# Altium PCB EP3C25.PcbDoc (part 1 of 4)
Units mil, origin at the board's own origin, x right, y up, seen from the top; angles counter-clockwise.
Board outline 6000 x 4000 mil, 2 copper layers (Top Layer, Bottom Layer); 113 components, 182 nets, 855 pads, 215 vias.
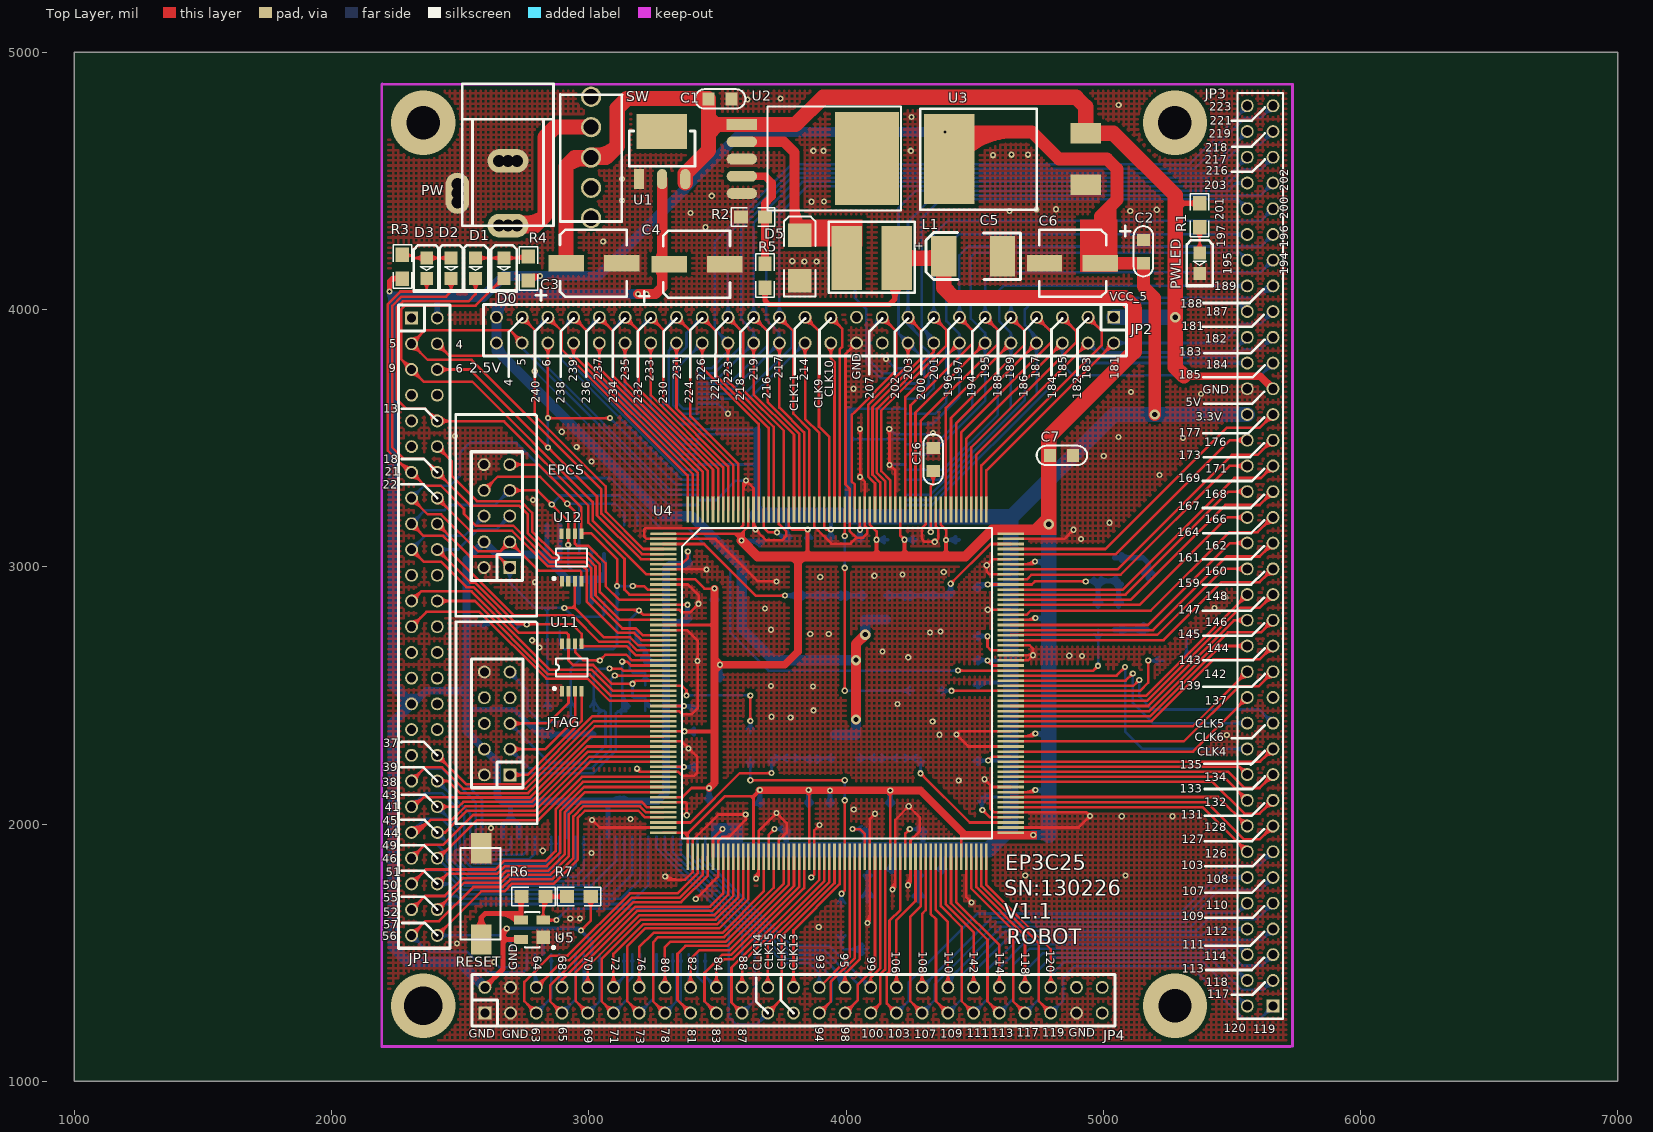
[diagram p0: Top Layer view]
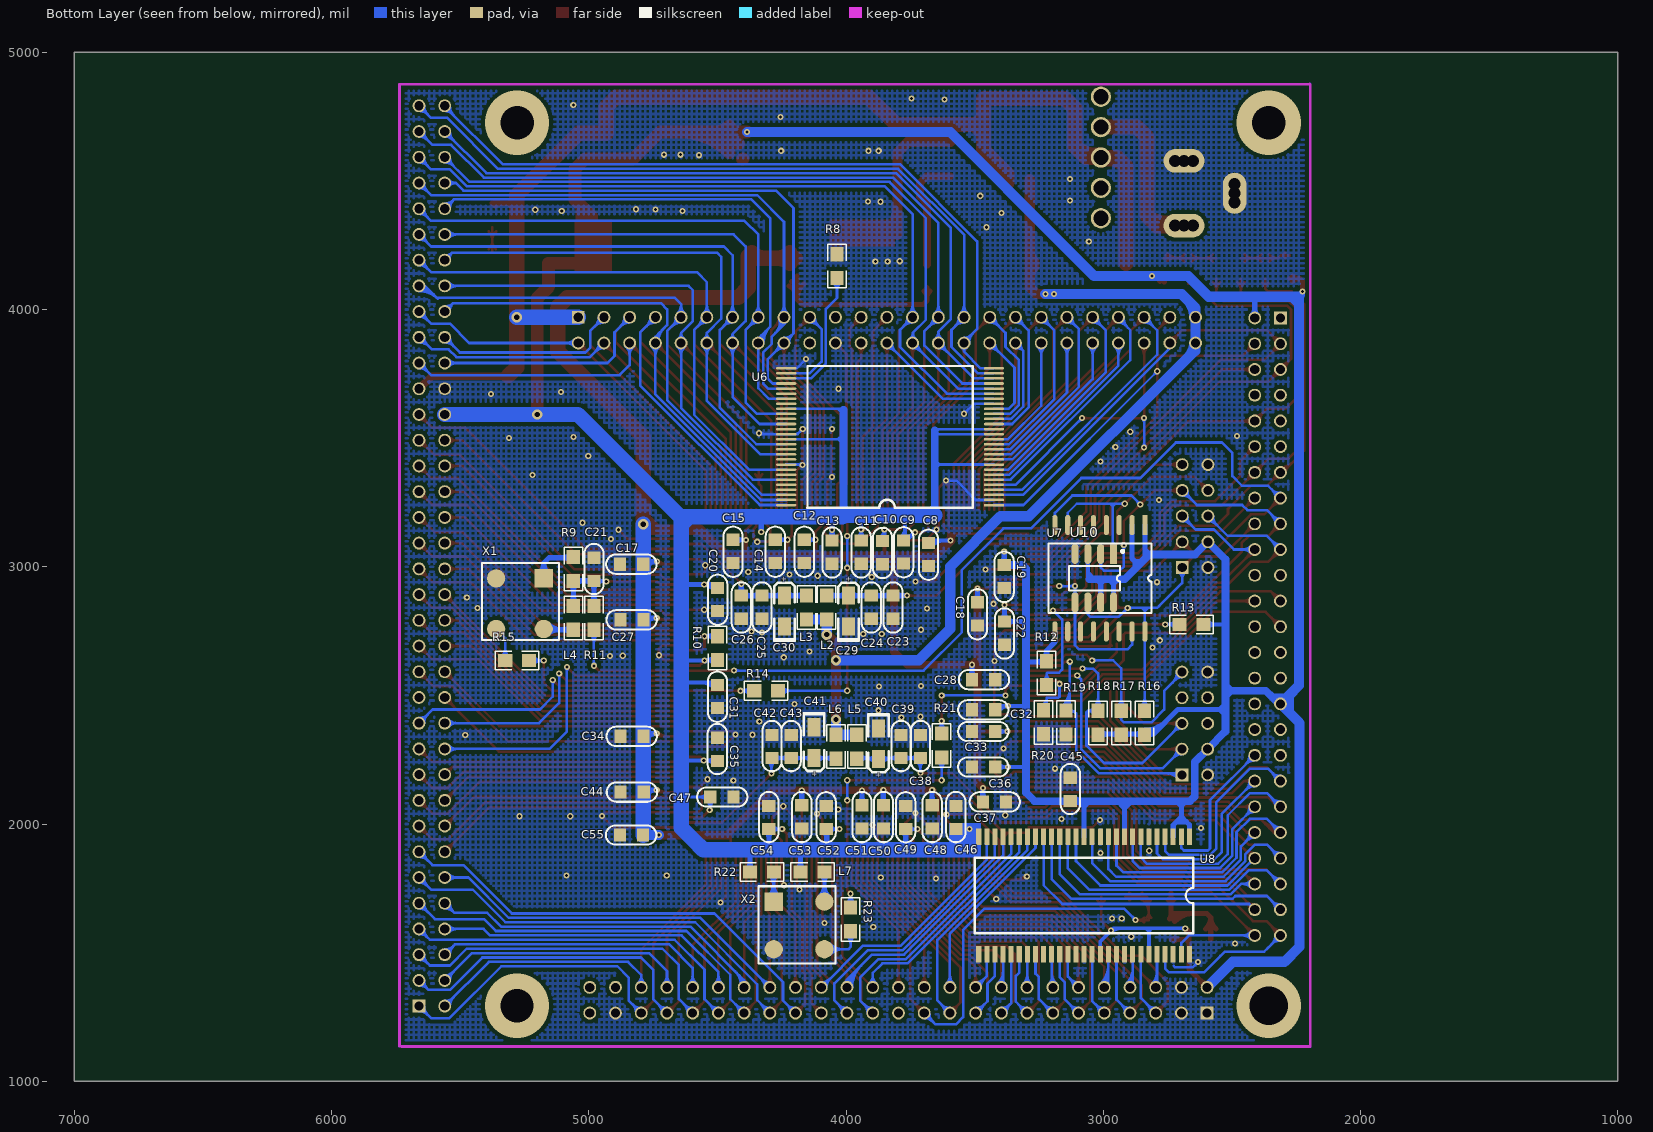
[diagram p1: Bottom Layer view, seen from below]

## Layer stack, top to bottom
Top Layer: signal copper 1.4
Dielectric: dielectric 12.6, FR-4, Dk 4.8
Bottom Layer: signal copper 1.4

## Board outline
1000,1000 7000,1000 7000,5000 1000,5000

## Design rules (kind name [scope] priority, off if disabled: settings)
Clearance Clearance_1 [InPolygon] p1: gap=15
Clearance [All] p2 off: gap=7
ComponentClearance [OnLayer('Keep-Out Layer') vs OnLayer('Keep-Out Layer')] p1: gap=0 collisioncheckmode=3 verticalgap=0 showdistances=FALSE
HoleSize [All] p1: absolutevalues=TRUE maxlimit=200 minlimit=1 maxpercent=80.000 minpercent=20.000
HoleToHoleClearance [All] p1: gap=0 allowstackedmicrovias=TRUE
MinimumSolderMaskSliver [All] p1: minsoldermaskwidth=0
PolygonConnect [All] p1: connectstyle=Direct reliefconductorwidth=20 reliefentries=4 polygonreliefangle="45 Angle"
RoutingVias [All] p1: holewidth=28 width=50 viastyle="Through Hole" minholewidth=12 minwidth=20 maxholewidth=200 maxwidth=300
SilkToSilkClearance [All] p1: silktosilkclearance=0
SilkscreenOverComponentPads [All] p1: minsilkscreentomaskgap=0
SolderMaskExpansion [All] p1: expansion=0
TestPointUsage [All] p1: valid=0 allowmultiple=FALSE
Testpoint [All] p1: side=15 testpointundercomponent=TRUE minsize=40 maxsize=100 preferedsize=60 minholesize=0 maxholesize=40 preferedholesize=32 testpointgrid=1 style=1023 order=0123456789
Width [All] p1: maxlimit=600 minlimit=8 preferedwidth=12
18 further rules are at their usual default settings.

## Components (designator, comment, footprint, x,y, rotation, side; value= is the part's Value field where it differs from the comment)
C1 "0.1uF" 0805C 3555,4819 r180 top
C2 "0.1uF" 0805C 5156,4270 r270 top
C3 "220uF" Cap6.6*6.6 3020,4180 r180 top locked
C4 "100uF" Cap6.6*6.6 3421,4176 r180 top
C5 "220uF" 8228 4380,4207 r0 top
C6 "100uF" Cap6.6*6.6 4880,4180 r0 top
C7 "0.1uF" 0805C 4883,3433 r180 top
C8 "0.1uF" 0805C 3679,3003 r90 bottom
C9 "0.1uF" 0805C 3776,3012.6 r90 bottom
C10 "0.1uF" 0805C 3858,3010 r90 bottom
C11 "0.1uF" 0805C 3941,3012 r90 bottom
C12 "0.1uF" 0805C 4162,3015 r90 bottom
C13 "0.1uF" 0805C 4054,3012 r90 bottom
C14 "0.1uF" 0805C 4275,3015 r90 bottom
C15 "0.1uF" 0805C 4439,3015 r90 bottom
C16 "0.1uF" 0805C 4339,3462 r270 top
C17 "0.1uF" 0805C 4878,3010 r180 bottom
C18 "0.1uF" 0805C 3489,2772 r90 bottom
C19 "0.1uF" 0805C 3385,2917 r90 bottom
C20 "0.1uF" 0805C 4499,2828 r90 bottom
C21 "0.1uF" 0805C 4980,3035 r270 bottom
C22 "0.1uF" 0805C 3384,2697 r90 bottom
C23 "0.001uF" 0805C 3817,2798 r90 bottom
C24 "0.1uF" 0805C 3902,2798 r90 bottom
C25 "0.001uF" 0805C 4327,2798 r90 bottom
C26 "0.1uF" 0805C 4407,2798 r90 bottom
C27 "0.1uF" 0805C 4877,2794 r180 bottom
C28 "0.1uF" 0805C 3420,2561 r0 bottom
C29 "10uF" 3216C/A 3990,2888 r270 bottom
C30 "10uF" 3216C/A 4239,2888 r270 bottom
C31 "0.1uF" 0805C 4500,2451 r90 bottom
C32 "0.1uF" 0805C 3510,2444 r180 bottom
C33 "0.1uF" 0805C 3510,2360 r180 bottom
C34 "0.1uF" 0805C 4877,2341 r180 bottom
C35 "0.1uF" 0805C 4500,2335 r270 bottom
C36 "0.1uF" 0805C 3510,2222 r180 bottom
C37 "0.1uF" 0805C 3378,2086 r0 bottom
C38 "0.001uF" 0805C 3710,2346.57 r270 bottom
C39 "0.1uF" 0805C 3786,2346.57 r270 bottom
C40 "10uF" 3216C/A 3873,2252 r90 bottom
C41 "10uF" 3216C/A 4124,2256 r90 bottom
C42 "0.001uF" 0805C 4288,2346.57 r270 bottom
C43 "0.1uF" 0805C 4213,2346.57 r270 bottom
C44 "0.1uF" 0805C 4876,2124 r180 bottom
C45 "0.1uF" 0805C 3128,2180 r270 bottom
C46 "0.1uF" 0805C 3573,2070.57 r270 bottom
C47 "0.1uF" 0805C 4437.6,2105 r0 bottom
C48 "0.1uF" 0805C 3665,1983.17 r90 bottom
C49 "0.1uF" 0805C 3768,2070 r270 bottom
C50 "0.1uF" 0805C 3854,1983.17 r90 bottom
C51 "0.1uF" 0805C 3938,1983.17 r90 bottom
C52 "0.1uF" 0805C 4077,2070 r270 bottom
C53 "0.1uF" 0805C 4172,1983.17 r90 bottom
C54 "0.1uF" 0805C 4300,2070.57 r270 bottom
C55 "0.1uF" 0805C 4879,1957 r180 bottom
D0 "LED0" 0805A 2670,4200 r270 top
D1 "LED1" 0805A 2560,4200 r270 top
D2 "LED2" 0805A 2465,4200 r270 top
D3 "LED3" 0805A 2370,4200 r270 top
D5 "S340" SMB 3820,4200 r90 top
EPCS "EPCS" IDC10_S 2693,2997 r0 top locked
JP1 "Bank1" IDC50-S 2349,3431 r180 top locked
JP2 "Bank2" IDC50-S 4505,3932 r90 top locked
JP3 "HEADER 36X2" IDC72_S 5594,3038 r0 top locked
JP4 "Bank4" IDC50-S 3132,1303 r270 top locked
JTAG "JTAG" IDC10_S 2694,2191 r0 top
L1 "1.5A" 临时画的电感封装 4100,4200 r0 top
L2 "600 Ohm@100Mhz" 0805R 4075,2795 r90 bottom
L3 "600 Ohm@100Mhz" 0805R 4154,2795 r90 bottom
L4 "600 Ohm@100Mhz" 0805R 5060,2755 r90 bottom
L5 "600 Ohm@100Mhz" 0805R 3958,2347 r270 bottom
L6 "600 Ohm@100Mhz" 0805R 4039,2347 r270 bottom
L7 "600 Ohm@100Mhz" 0805R 4084,1813 r0 bottom
PW "CON3" PW_PORT 2690,4472 r0 top
PWLED "LED" 0805A 5375,4220 r270 top
R1 "1K" 0805R 5375,4320 r90 top
R2 "NC" 0805R 3592,4360 r0 top
R3 "1K" 0805R 2275,4120 r90 top
R4 "1K" 0805R 2765,4113 r90 top
R5 "0" 0805R 3685,4085 r90 top
R6 "NC" 0805R 2832,1718 r180 top
R7 "4.7K" 0805R 3008,1718 r180 top
R8 "5.1K" 0805R 4035,4215 r270 bottom
R9 "10K" 0805R 5060,2945 r90 bottom
R10 "10K" 0805R 4500,2637 r90 bottom
R11 "10K" 0805R 4980,2755 r90 bottom
R12 "10K" 0805R 3220,2540 r90 bottom
R13 "10K" 0805R 2703.17,2776 r180 bottom
R14 "0" 0805R 4264,2518 r0 bottom
R15 "33" 0805R 5325,2635 r180 bottom
R16 "10K" 0805R 2840,2440 r270 bottom
R17 "10K" 0805R 2930,2440 r270 bottom
R18 "10K" 0805R 3020,2440 r270 bottom
R19 "10K" 0805R 3145,2348 r90 bottom
R20 "10K" 0805R 3232,2349 r90 bottom
R21 "0" 0805R 3628,2352 r270 bottom
R22 "10K" 0805R 4373,1813 r180 bottom
R23 "33" 0805R 3982,1583 r90 bottom
RESET "SW-PB" SMD_SWITH 2577,1746 r270 top
SW "SW SPDT" PW_SW 3009,4591 r180 top
U1 "1117-2.5" SOT-223 3195,4507 r0 top
U2 "LM2596" LM2596_TO263 3888,4596 r180 top
U3 "AMS1084_33" AMS1084-ADJ 4574,4574 r0 top
U4 "EP3C25" PQFP240 3290,3128 r0 top locked
U5 "MAX811T" SOT143 2780,1589 r90 top
U6 "JS28F640" SOP56_E28F640 3435,3240 r0 bottom locked
U7 "EPCS16" SOP16_EPCS16 2838,3162 r270 bottom locked
U8 "HY57V641620" TSOP54 2665,1950 r270 bottom locked
U10 "EPCS4" so8 2959.84,3050 r270 bottom locked
U11 "PACDN046M" MSOP8 2934,2608.18 r180 top
U12 "PACDN046M" MSOP8 2933,3035.82 r180 top
X1 "CLOCK_SOURCE" CRYSTAL4 5175,2955 r270 bottom
X2 "CLOCK_SOURCE" CRYSTAL4 4281,1698 r180 bottom

## Footprints (in the part's own frame and the unit in brackets; to place one, negate y for a bottom-side part, rotate by r counter-clockwise, add the part's x,y. Pads: shape width x height; smd on the part's side, far side on the other; paste and mask are expansions set on the pad)
0805A [mil]
  rect 50x50 smd: 1(0,0) 2(80,0)
  silkscreen extent -50,-50 130,50
0805C [mm]
  rect 1.2x1.3 smd: 1(0,0) 2(2.286,0)
  silkscreen extent -1.37,-0.95 3.59,0.95
0805R [mm]
  rect 1.4x1.3 smd: 1(0,0) 2(2.362,0)
  silkscreen extent -0.97,-0.91 3.33,0.91
3216C/A [mm] "钽电容封装A"
  rect 1.78x1.27 smd: 1(0,0) 2(3.05,0)
  silkscreen extent -1.27,-1.02 4.44,1.02
8228 [mm]
  rect 2.5x4 smd: 1(0,0) 2(5.8,0)
  silkscreen extent -1.75,-2.31 7.57,2.36
AMS1084-ADJ [mil]
  rect 118.11x78.74 smd: 1(358,-89) 3(358,111)
  rect 196.85x350.85 smd: 2(-172,11)
  silkscreen extent -285,-186 168,207
Cap6.6*6.6 [mm]
  rect 3.5x1.6 smd: 1(2.75,0) 2(-2.75,0)
  silkscreen extent -3.25,-3.3 5.73,3.68
CRYSTAL4 [mm]
  rect 1.8x1.8 smd: 1(0,0)
  round 1.8 smd: 2(0,-4.7) 3(5,-4.7) 4(5,0)
  silkscreen extent -1.52,-6.1 6.1,1.52
IDC10_S [mm]
  rect 1.27x1.27 hole 0.9: 1(0,0)
  round 1.27 hole 0.9: 2(-2.54,0) 3(0,2.54) 4(-2.54,2.54) 5(0,5.08) 6(-2.54,5.08) 7(0,7.62) 8(-2.54,7.62) 9(0,10.16) 10(-2.54,10.16)
  silkscreen extent -5.33,-4.83 2.67,15.11
IDC50-S [mil]
  rect 50x50 hole 35.43: 1(38,-536)
  round 50 hole 35.43: 2(-62,-536) 3(38,-436) 4(-62,-436) 5(38,-336) 6(-62,-336) 7(38,-236) 8(-62,-236) 9(38,-136) 10(-62,-136) 11(38,-36) 12(-62,-36) 13(38,64) 14(-62,64) 15(38,164) 16(-62,164) 17(38,264) 18(-62,264) 19(38,364) 20(-62,364) 21(38,464) 22(-62,464) 23(38,564) 24(-62,564) 25(38,664) 26(-62,664) 27(38,764) 28(-62,764) 29(38,864) 30(-62,864) 31(38,964) 32(-62,964) 33(38,1064) 34(-62,1064) 35(38,1164) 36(-62,1164) 37(38,1264) 38(-62,1264) 39(38,1364) 40(-62,1364) 41(38,1464) 42(-62,1464) 43(38,1564) 44(-62,1564) 45(38,1664) 46(-62,1664) 47(38,1764) 48(-62,1764) 49(38,1864) 50(-62,1864)
  silkscreen extent -112,-586 88,1914
IDC72_S [mil]
  rect 50x50 hole 35.43: 1(66,-1746)
  round 50 hole 35.43: 2(-34,-1746) 3(66,-1646) 4(-34,-1646) 5(66,-1546) 6(-34,-1546) 7(66,-1446) 8(-34,-1446) 9(66,-1346) 10(-34,-1346) 11(66,-1246) 12(-34,-1246) 13(66,-1146) 14(-34,-1146) 15(66,-1046) 16(-34,-1046) 17(66,-946) 18(-34,-946) 19(66,-846) 20(-34,-846) 21(66,-746) 22(-34,-746) 23(66,-646) 24(-34,-646) 25(66,-546) 26(-34,-546) 27(66,-446) 28(-34,-446) 29(66,-346) 30(-34,-346) 31(66,-246) 32(-34,-246) 33(66,-146) 34(-34,-146) 35(66,-46) 36(-34,-46) 37(66,54) 38(-34,54) 39(66,154) 40(-34,154) 41(66,254) 42(-34,254) 43(66,354) 44(-34,354) 45(66,454) 46(-34,454) 47(66,554) 48(-34,554) 49(66,654) 50(-34,654) 51(66,754) 52(-34,754) 53(66,854) 54(-34,854) 55(66,954) 56(-34,954) 57(66,1054) 58(-34,1054) 59(66,1154) 60(-34,1154) 61(66,1254) 62(-34,1254) 63(66,1354) 64(-34,1354) 65(66,1454) 66(-34,1454) 67(66,1554) 68(-34,1554) 69(66,1654) 70(-34,1654) 71(66,1754) 72(-34,1754)
  silkscreen extent -72,-1795 104,1803
LM2596_TO263 [mm]
  rect 6.35x9.16 smd: 0(-4.928,0.229)
  rect 3x1.07 smd: 1(7.442,-3.124)
  oval 3x1.07 smd: 2(7.442,-1.424) 3(7.442,0.276) 4(7.442,1.976) 5(7.442,3.676)
  silkscreen extent -8.25,-4.9 4.93,5.36
MSOP8 [mm] "EP3核心板专用 引脚短版"
  rect 0.4x1.042 smd paste+0 mask+0: 1(0.96,2.329)
  rect 0.4x1.042 smd: 2(0.325,2.329) 3(-0.325,2.329) 4(-0.975,2.329) 5(-0.975,-2.329) 6(-0.325,-2.329) 7(0.325,-2.329) 8(0.975,-2.329)
  silkscreen extent -1.55,-0.9 1.85,2.2
PQFP240 [mm]
  oval 2.6x0.254 smd: 1(0,0)
  rect 2.6x0.254 smd: 2(0,-0.5) 3(0,-1) 4(0,-1.5) 5(0,-2) 6(0,-2.5) 7(0,-3) 8(0,-3.5) 9(0,-4) 10(0,-4.5) 11(0,-5) 12(0,-5.5) 13(0,-6) 14(0,-6.5) 15(0,-7) 16(0,-7.5) 17(0,-8) 18(0,-8.5) 19(0,-9) 20(0,-9.5) 21(0,-10) 22(0,-10.5) 23(0,-11) 24(0,-11.5) 25(0,-12) 26(0,-12.5) 27(0,-13) 28(0,-13.5) 29(0,-14) 30(0,-14.5) 31(0,-15) 32(0,-15.5) 33(0,-16) 34(0,-16.5) 35(0,-17) 36(0,-17.5) 37(0,-18) 38(0,-18.5) 39(0,-19) 40(0,-19.5) 41(0,-20) 42(0,-20.5) 43(0,-21) 44(0,-21.5) 45(0,-22) 46(0,-22.5) 47(0,-23) 48(0,-23.5) 49(0,-24) 50(0,-24.5) 51(0,-25) 52(0,-25.5) 53(0,-26) 54(0,-26.5) 55(0,-27) 56(0,-27.5) 57(0,-28) 58(0,-28.5) 59(0,-29) 60(0,-29.5) 121(34.3,-29.5) 122(34.3,-29) 123(34.3,-28.5) 124(34.3,-28) 125(34.3,-27.5) 126(34.3,-27) 127(34.3,-26.5) 128(34.3,-26) 129(34.3,-25.5) 130(34.3,-25) 131(34.3,-24.5) 132(34.3,-24) 133(34.3,-23.5) 134(34.3,-23) 135(34.3,-22.5) 136(34.3,-22) 137(34.3,-21.5) 138(34.3,-21) 139(34.3,-20.5) 140(34.3,-20) 141(34.3,-19.5) 142(34.3,-19) 143(34.3,-18.5) 144(34.3,-18) 145(34.3,-17.5) 146(34.3,-17) 147(34.3,-16.5) 148(34.3,-16) 149(34.3,-15.5) 150(34.3,-15) 151(34.3,-14.5) 152(34.3,-14) 153(34.3,-13.5) 154(34.3,-13) 155(34.3,-12.5) 156(34.3,-12) 157(34.3,-11.5) 158(34.3,-11) 159(34.3,-10.5) 160(34.3,-10) 161(34.3,-9.5) 162(34.3,-9) 163(34.3,-8.5) 164(34.3,-8) 165(34.3,-7.5) 166(34.3,-7) 167(34.3,-6.5) 168(34.3,-6) 169(34.3,-5.5) 170(34.3,-5) 171(34.3,-4.5) 172(34.3,-4) 173(34.3,-3.5) 174(34.3,-3) 175(34.3,-2.5) 176(34.3,-2) 177(34.3,-1.5) 178(34.3,-1) 179(34.3,-0.5) 180(34.3,0)
  rect 0.254x2.6 smd: 61(2.4,-31.9) 62(2.9,-31.9) 63(3.4,-31.9) 64(3.9,-31.9) 65(4.4,-31.9) 66(4.9,-31.9) 67(5.4,-31.9) 68(5.9,-31.9) 69(6.4,-31.9) 70(6.9,-31.9) 71(7.4,-31.9) 72(7.9,-31.9) 73(8.4,-31.9) 74(8.9,-31.9) 75(9.4,-31.9) 76(9.9,-31.9) 77(10.4,-31.9) 78(10.9,-31.9) 79(11.4,-31.9) 80(11.9,-31.9) 81(12.4,-31.9) 82(12.9,-31.9) 83(13.4,-31.9) 84(13.9,-31.9) 85(14.4,-31.9) 86(14.9,-31.9) 87(15.4,-31.9) 88(15.9,-31.9) 89(16.4,-31.9) 90(16.9,-31.9) 91(17.4,-31.9) 92(17.9,-31.9) 93(18.4,-31.9) 94(18.9,-31.9) 95(19.4,-31.9) 96(19.9,-31.9) 97(20.4,-31.9) 98(20.9,-31.9) 99(21.4,-31.9) 100(21.9,-31.9) 101(22.4,-31.9) 102(22.9,-31.9) 103(23.4,-31.9) 104(23.9,-31.9) 105(24.4,-31.9) 106(24.9,-31.9) 107(25.4,-31.9) 108(25.9,-31.9) 109(26.4,-31.9) 110(26.9,-31.9) 111(27.4,-31.9) 112(27.9,-31.9) 113(28.4,-31.9) 114(28.9,-31.9) 115(29.4,-31.9) 116(29.9,-31.9) 117(30.4,-31.9) 118(30.9,-31.9) 119(31.4,-31.9) 120(31.9,-31.9) 181(31.9,2.4) 182(31.4,2.4) 183(30.9,2.4) 184(30.4,2.4) 185(29.9,2.4) 186(29.4,2.4) 187(28.9,2.4) 188(28.4,2.4) 189(27.9,2.4) 190(27.4,2.4) 191(26.9,2.4) 192(26.4,2.4) 193(25.9,2.4) 194(25.4,2.4) 195(24.9,2.4) 196(24.4,2.4) 197(23.9,2.4) 198(23.4,2.4) 199(22.9,2.4) 200(22.4,2.4) 201(21.9,2.4) 202(21.4,2.4) 203(20.9,2.4) 204(20.4,2.4) 205(19.9,2.4) 206(19.4,2.4) 207(18.9,2.4) 208(18.4,2.4) 209(17.9,2.4) 210(17.4,2.4) 211(16.9,2.4) 212(16.4,2.4) 213(15.9,2.4) 214(15.4,2.4) 215(14.9,2.4) 216(14.4,2.4) 217(13.9,2.4) 218(13.4,2.4) 219(12.9,2.4) 220(12.4,2.4) 221(11.9,2.4) 222(11.4,2.4) 223(10.9,2.4) 224(10.4,2.4) 225(9.9,2.4) 226(9.4,2.4) 227(8.9,2.4) 228(8.4,2.4) 229(7.9,2.4) 230(7.4,2.4) 231(6.9,2.4) 232(6.4,2.4) 233(5.9,2.4) 234(5.4,2.4) 235(4.9,2.4) 236(4.4,2.4) 237(3.9,2.4) 238(3.4,2.4) 239(2.9,2.4) 240(2.4,2.4)
  silkscreen extent 1.83,-30.06 32.46,0.56
PW_PORT [mil]
  round 47 hole 47: 1(-39,-146) 1(31,-146) 2(-201,-55) 2(-201,15) 3(-39,106) 3(31,106)
  oval 160x92 hole 47: 1(-4,-146) 3(-4,106)
  oval 92x160 hole 47: 2(-201,-20)
  silkscreen extent -181,-146 173,405
PW_SW [mm]
  round 2 hole 1.5: 1(0,-3) 2(0,0) 3(0,3) ""(0,6) ""(0,-6)
  silkscreen extent -3.06,-6.23 3.04,6.33
SMB [mm] "DO-214-AA/SMB; 2 C-Bend Leads; Body 5.3 x 3.6 mm, inc. leads (LxW)"
  rect 2.3x2.3 smd: 1(-2.25,0) 2(2.25,0)
  silkscreen extent -3.8,-1.55 4.1,1.55
SMD_SWITH [mil]
  rect 118.11x78.74 smd: 1(-160,5) 2(195,5)
  silkscreen extent -160,-75 195,80
so8 [mm] "EP3特色的SO8，瘦版。"
  rect 1.973x0.7 smd: 1(0,0)
  oval 1.973x0.7 smd: 2(0,-1.27) 3(0,-2.54) 4(0,-3.81) 5(4.792,-3.81) 6(4.792,-2.54) 7(4.792,-1.27) 8(4.792,0)
  silkscreen extent -0.38,-4.41 3.6,1.02
SOP16_EPCS16 [mm]
  rect 2x0.5 smd: 1(0,0)
  oval 2x0.5 smd: 2(0,-1.27) 3(0,-2.54) 4(0,-3.81) 5(0,-5.08) 6(0,-6.35) 7(0,-7.62) 8(0,-8.89) 9(10.5,-8.89) 10(10.5,-7.62) 11(10.5,-6.35) 12(10.5,-5.08) 13(10.5,-3.81) 14(10.5,-2.54) 15(10.5,-1.27) 16(10.5,0)
  silkscreen extent 1.83,-9.53 8.67,0.63
SOP56_E28F640 [mm]
  rect 2x0.25 smd: 1(-0.254,0)
  oval 2x0.25 smd: 2(-0.254,-0.5) 3(-0.254,-1) 4(-0.254,-1.5) 5(-0.254,-2) 6(-0.254,-2.5) 7(-0.254,-3) 8(-0.254,-3.5) 9(-0.254,-4) 10(-0.254,-4.5) 11(-0.254,-5) 12(-0.254,-5.5) 13(-0.254,-6) 14(-0.254,-6.5) 15(-0.254,-7) 16(-0.254,-7.5) 17(-0.254,-8) 18(-0.254,-8.5) 19(-0.254,-9) 20(-0.254,-9.5) 21(-0.254,-10) 22(-0.254,-10.5) 23(-0.254,-11) 24(-0.254,-11.5) 25(-0.254,-12) 26(-0.254,-12.5) 27(-0.254,-13) 28(-0.254,-13.5) 29(20.254,-13.5) 30(20.254,-13) 31(20.254,-12.5) 32(20.254,-12) 33(20.254,-11.5) 34(20.254,-11) 35(20.254,-10.5) 36(20.254,-10) 37(20.254,-9.5) 38(20.254,-9) 39(20.254,-8.5) 40(20.254,-8) 41(20.254,-7.5) 42(20.254,-7) 43(20.254,-6.5) 44(20.254,-6) 45(20.254,-5.5) 46(20.254,-5) 47(20.254,-4.5) 48(20.254,-4) 49(20.254,-3.5) 50(20.254,-3) 51(20.254,-2.5) 52(20.254,-2) 53(20.254,-1.5) 54(20.254,-1) 55(20.254,-0.5) 56(20.254,0)
  silkscreen extent 1.83,-13.75 18.17,0.25
SOT143 [mm]
  rect 1.35x1.35 smd: 1(-0.75,-1.1)
  rect 0.9x1.35 smd: 2(0.95,-1.1) 3(0.95,1.1) 4(-0.95,1.1)
  silkscreen extent -1.87,-2.23 1.75,0.7
SOT-223 [mm]
  rect 1x2 smd: 1(0,0)
  oval 1x2 smd: 2(2.29,0) 3(4.58,0)
  rect 5x3.5 smd: 4(2.261,4.699)
  silkscreen extent -0.97,1.25 5.54,4.78
TSOP54 [mm]
  rect 1.651x0.5 smd: 1(-0.003,0) 2(-0.003,-0.8) 3(-0.003,-1.6) 4(-0.003,-2.4) 5(-0.003,-3.2) 6(-0.003,-4) 7(-0.003,-4.8) 8(-0.003,-5.6) 9(-0.003,-6.4) 10(-0.003,-7.2) 11(-0.003,-8) 12(-0.003,-8.8) 13(-0.003,-9.6) 14(-0.003,-10.4) 15(-0.003,-11.2) 16(-0.003,-12) 17(-0.003,-12.8) 18(-0.003,-13.6) 19(-0.003,-14.4) 20(-0.003,-15.2) 21(-0.003,-16) 22(-0.003,-16.8) 23(-0.003,-17.6) 24(-0.003,-18.4) 25(-0.003,-19.2) 26(-0.003,-20) 27(-0.003,-20.8) 28(11.597,-20.8) 29(11.597,-20) 30(11.597,-19.2) 31(11.597,-18.4) 32(11.597,-17.6) 33(11.597,-16.8) 34(11.597,-16) 35(11.597,-15.2) 36(11.597,-14.4) 37(11.597,-13.6) 38(11.597,-12.8) 39(11.597,-12) 40(11.597,-11.2) 41(11.597,-10.4) 42(11.597,-9.6) 43(11.597,-8.8) 44(11.597,-8) 45(11.597,-7.2) 46(11.597,-6.4) 47(11.597,-5.6) 48(11.597,-4.8) 49(11.597,-4) 50(11.597,-3.2) 51(11.597,-2.4) 52(11.597,-1.6) 53(11.597,-0.8) 54(11.597,0)
  silkscreen extent 2.08,-21.2 9.51,0.4
临时画的电感封装 [mm] "用于EP3C25核心板复制"
  rect 3x6.3 smd: 1(-2.476,0) 2(2.476,0)
  silkscreen extent -4.25,-3.43 4.25,3.57

## Part data
C1 C2 C7 C8 C9 C10 C11 C12 C13 C14 C15 C16 C17 C18 C19 C20 C21 C22 C23 C24 C25 C26 C27 C28 C31 C32 C33 C34 C35 C36 C37 C38 C39 C42 C43 C44 C45 C46 C47 C48 C49 C50 C51 C52 C53 C54 C55: library part Cap, "Capacitor"
C3 C4 C5 C6 C29 C30 C40 C41: library part "Cap Pol3", "Polarized Capacitor (Surface Mount)"
D0: "Typical INFRARED GaAs LED"
D1 D2 D3: library part LED0, "Typical INFRARED GaAs LED"
D5: library part "D Schottky", "Schottky Diode"
L1 L2 L3 L4 L5 L6 L7: library part Inductor, "Inductor"
PWLED: library part LED1, "Typical RED GaAs LED"
R1 R2 R3 R4 R5 R6 R7 R8 R9 R10 R11 R12 R13 R14 R15 R16 R17 R18 R19 R20 R21 R22 R23: library part Res2, "Resistor"
U11 U12: library part EPCS

## Via types
v1: diameter 24, hole 12, Top Layer to Bottom Layer, 205 vias
v2: diameter 40, hole 20, Top Layer to Bottom Layer, 6 vias
v3: diameter 250, hole 130, Top Layer to Bottom Layer, 3 vias
v4: diameter 250, hole 150, Top Layer to Bottom Layer, 1 vias

## Nets (pads, with @x,y where several pads share a name; then routed paths per layer and width w, separated by ;. In a path a pad name is that pad's centre, name@x,y a point inside that pad or via, vN(x,y) a via of type N, cw(c..) or ccw(c..) an arc to the next point about the centre after c; other vN are vias at no path point)
4: JP1.4 JP2.47 U4.4 U6.1 | length 2688.3
  Top Layer w10: JP1.4@2411,3847 cw(c2411,3798.72) 2445.14,3832.86 cw(c2479.28,3867) JP1.4@2431,3867 ; JP1.4@2411,3867 2457,3821 2780,3821 2781,3820 ; JP2.47@2741,3950 cw(c2741,3901.72) 2775.14,3935.86 cw(c2809.28,3970) JP2.47@2761,3970 ; JP2.47@2741,3970 2790,3921 2790,3829 2781,3820 ; v1@2785.05,3755.05 cw(c2773.1,3743.1) 2790,3743.1 cw(c2806.9,3743.1) v1@2794.95,3755.05 ; v1@2785.05,3764.95 ccw(c2773.1,3776.9) 2790,3776.9 ccw(c2806.9,3776.9) v1@2794.95,3764.95 ; 2790,3808 2790,3811 2781,3820 ; 2790,3843 2790,3588 3065.97,3312.03 3065.97,3214.03 3211.05,3068.95 U4.4@3290,3068.95
  Bottom Layer w10: v1@2790,3753 cw(c2790,3736.1) 2801.95,3748.05 cw(c2813.9,3760) v1@2797,3760 ; v1(2790,3760) 3310,3240 U6.1@3425,3240
5: JP1.3 JP2.48 U4.5 U6.3 | length 3036.7
  Top Layer w10: JP1.3@2311,3847 cw(c2311,3798.72) 2345.14,3832.86 cw(c2379.28,3867) 2331,3867 cw(c2379.28,3867) 2345.14,3901.14 cw(c2311,3935.28) JP1.3@2311,3887 ; 2705.44,3907.56 cw(c2667.89,3870) JP2.48@2721,3870 ; 2710.27,3902.73 ccw(c2741,3933.46) JP2.48@2741,3890 ; 2722.51,3890.49 cw(c2702.03,3870) JP2.48@2731,3870 ; JP2.48@2741,3870 2741,3872 2693,3920 2364,3920 JP1.3@2311,3867 2374,3804 2544.96,3804 3048.97,3299.99 3048.97,3206.99 3206.7,3049.26 U4.5@3290,3049.26
  Bottom Layer w10: JP2.48@2741,3870 2741,3849.96 3311.59,3279.37 U6.3@3425,3279.37
6: JP1.6 JP2.46 U4.6 U6.5 | length 2689.3
  Top Layer w10: JP1.6@2411,3767 2539,3767 3031.97,3274.03 3031.97,3199.94 3202.34,3029.58 U4.6@3290,3029.58 ; JP1.6@2425.14,3752.86 cw(c2459.28,3718.72) 2459.28,3767 cw(c2459.28,3815.28) JP1.6@2425.14,3781.14 ; JP2.46@2826.86,3855.86 cw(c2792.72,3821.72) 2841,3821.72 cw(c2889.28,3821.72) JP2.46@2855.14,3855.86 ; 2828.34,3477.66 cw(c2814.69,3464) v1@2834,3464 ; 2830.76,3475.24 ccw(c2841,3485.49) v1@2841,3471 ; v1@2836.05,3582.95 ccw(c2824.1,3594.9) 2841,3594.9 ccw(c2857.9,3594.9) 2845.95,3582.95 ccw(c2857.9,3594.9) 2857.9,3578 ccw(c2857.9,3561.1) v1@2845.95,3573.05 ; v1@2841,3457 cw(c2841,3437.69) 2854.66,3451.34 ; JP2.46@2841,3870 v1(2841,3578) v1(3082,3578) ; v1@2848,3464 ccw(c2862.49,3464) 2852.24,3453.76 ; v1@3077.05,3573.05 ccw(c3065.1,3561.1) 3065.1,3578 ccw(c3065.1,3594.9) v1@3077.05,3582.95
  Bottom Layer w10: v1@2836.05,3468.95 ccw(c2824.1,3480.9) 2841,3480.9 ccw(c2857.9,3480.9) v1@2845.95,3468.95 ; v1@2836.05,3573.05 cw(c2824.1,3561.1) 2841,3561.1 cw(c2857.9,3561.1) v1@2845.95,3573.05 ; v1(2841,3464) v1(2841,3578) ; v1@3082,3571 cw(c3082,3554.1) 3093.95,3566.05 cw(c3105.9,3578) v1@3089,3578 ; v1(3082,3578) 3341.26,3318.74 U6.5@3425,3318.74
9: D0.2 JP1.5 U4.9 | length 2418.7
  Top Layer w10: JP1.5@2291,3767 ccw(c2242.72,3767) 2276.86,3801.14 ccw(c2311,3835.28) JP1.5@2311,3787 ; JP1.5@2311,3747 cw(c2311,3698.72) 2345.14,3732.86 cw(c2379.28,3767) JP1.5@2331,3767 ; 2474.91,3720 2358,3720 ; 2627.32,4082.32 cw(c2670,4039.64) D0.2@2670,4100 ; 2639.39,4094.39 ccw(c2613.79,4120) D0.2@2650,4120 ; 2644.39,4099.39 cw(c2670,4073.79) D0.2@2670,4110 ; D0.2@2665,4120 2560,4015 2285,4015 2270,4000 2270,3808 JP1.5@2311,3767 2358,3720 ; U4.9@3290,2970.52 3224.39,2970.52 3014.97,3179.94 3014.97,3252.03 2547,3720 2358,3720
13: D1.2 JP1.10 U4.13 | length 2456.7
  Top Layer w10: JP1.10@2391,3567 ccw(c2342.72,3567) 2376.86,3601.14 ccw(c2411,3635.28) JP1.10@2411,3587 ; JP1.10@2418.07,3574.07 ccw(c2439.97,3595.97) 2439.97,3565 ; JP1.10@2425.14,3552.86 cw(c2454.46,3523.54) 2454.46,3565 ; JP1.10@2425.14,3581.14 ccw(c2464.11,3620.11) 2464.11,3565 ; D1.2@2545.86,4105.86 cw(c2511.72,4071.72) 2560,4071.72 cw(c2608.28,4071.72) D1.2@2574.14,4105.86 ; D1.2@2560,4120 2560,4060 2532,4032 2277.96,4032 2253,4007.04 2253,3652 2290,3615 2363,3615 JP1.10@2411,3567 2413,3565 2605,3565 2671,3565 2997.97,3238.03 2997.97,3172.03 3139,3031 3139,2911 3158.22,2891.78 U4.13@3290,2891.78
18: D2.2 JP1.14 U4.18 | length 2520.6
  Top Layer w10: JP1.14@2391,3367 ccw(c2342.72,3367) 2376.86,3401.14 ccw(c2411,3435.28) JP1.14@2411,3387 ; JP1.14@2411,3347 cw(c2411,3298.72) 2445.14,3332.86 cw(c2479.28,3367) JP1.14@2431,3367 ; D2.2@2450.86,4105.86 cw(c2416.72,4071.72) 2465,4071.72 cw(c2513.28,4071.72) D2.2@2479.14,4105.86 ; D2.2@2465,4120 2465,4070 2445,4050 2271.92,4050 2236,4014.08 2236,3464 2280,3420 2358,3420 JP1.14@2411,3367 2540,3238 2727.96,3238 2763,3202.96 2763,3129.9 2857.26,3035.64 2992.45,3035.64 3026.26,3001.82 3026.26,2888.74 3121.64,2793.36 U4.18@3290,2793.36
21: D3.2 JP1.13 U4.21 | length 2472.8
  Top Layer w10: 2263.2,3406.8 ccw(c2311,3454.6) JP1.13@2311,3387 ; 2280.27,3389.73 ccw(c2311,3420.46) JP1.13@2311,3377 ; 2282.51,3387.49 cw(c2262.03,3367) JP1.13@2291,3367 ; JP1.13@2311,3347 cw(c2311,3298.72) 2345.14,3332.86 cw(c2379.28,3367) JP1.13@2331,3367 ; D3.2@2358,4104 cw(c2340,4080) 2370,4080 ; D3.2@2370,4120 2370,4080 ; D3.2@2382,4104 ccw(c2400,4080) 2370,4080 ; U4.21@3290,2734.3 3209.26,2734.3 3183.54,2760.02 3130.94,2760.02 3009.26,2881.7 3009.26,2994.78 2985.4,3018.64 2847.73,3018.64 2706.37,3160 2560,3160 2515,3205 2515,3225 2425,3315 2363,3315 JP1.13@2311,3367 2303,3367 2219,3451 2219,4021.12 2267.88,4070 2360,4070 2370,4080
22: JP1.16 U4.22 | length 1256.3
  Top Layer w10: JP1.16@2411,3247 cw(c2411,3198.72) 2445.14,3232.86 cw(c2479.28,3267) JP1.16@2431,3267 ; JP1.16@2411,3267 2538,3140 2702.33,3140 2840.69,3001.64 2978.36,3001.64 2992.26,2987.74 2992.26,2863.74 3112.98,2743.02 3176.5,2743.02 3204.9,2714.62 U4.22@3290,2714.62
49: JP1.44 U4.49 U8.15 | length 2007.5
  Top Layer w10: JP1.44@2411,1867 2417,1867 2565,2015 2804.75,2015 2972.87,2183.12 U4.49@3290,2183.12 ; JP1.44@2411,1877 ccw(c2411,1915.63) 2438.31,1888.31 ; JP1.44@2411,1887 ccw(c2411,1949.77) 2455.38,1905.38 ; JP1.44@2431,1867 cw(c2464.8,1867) 2440.9,1890.9
  Bottom Layer w10: JP1.44@2411,1867 2412.79,1867 2431,1848.79 2431,1847.68 2517.68,1761 3011,1761 3105.94,1855.94 U8.15@3105.94,1950.11 ; U8.15@3102.52,1924.03 cw(c3094.25,1915.76) 3105.94,1915.76 cw(c3117.63,1915.76) U8.15@3109.37,1924.03
50: JP1.45 U4.50 U8.16 | length 2445.4
  Top Layer w10: JP1.45@2311,1767 2367,1823 2636.79,1823 2670.4,1856.6 2832.6,1856.6 2871,1895 2871,2057.21 2977.23,2163.44 U4.50@3290,2163.44 ; JP1.45@2311,1787 ccw(c2311,1835.28) 2345.14,1801.14 ccw(c2379.28,1767) JP1.45@2331,1767
  Bottom Layer w10: JP1.45@2311,1767 2364,1820 2434.64,1820 2510.64,1744 3054,1744 3137.44,1827.44 U8.16@3137.44,1950.11 ; JP1.45@2311,1787 ccw(c2311,1835.28) 2345.14,1801.14 ccw(c2379.28,1767) JP1.45@2331,1767 ; U8.16@3134.02,1924.03 cw(c3125.75,1915.76) 3137.44,1915.76 cw(c3149.13,1915.76) U8.16@3140.87,1924.03
51: JP1.46 U4.51 U8.17 | length 2252.7
  Top Layer w10: JP1.46@2411,1767 2450,1806 2643.83,1806 2673.83,1836 2836.04,1836 2889,1888.96 2889,2051.17 2981.58,2143.75 U4.51@3290,2143.75 ; JP1.46@2411,1787 ccw(c2411,1835.28) 2445.14,1801.14 ccw(c2479.28,1767) JP1.46@2431,1767
  Bottom Layer w10: JP1.46@2411,1767 2463.6,1767 2503.6,1727 3092,1727 3168.94,1803.94 U8.17@3168.94,1950.11 ; JP1.46@2425.14,1752.86 cw(c2459.28,1718.72) 2459.28,1767 cw(c2459.28,1815.28) JP1.46@2425.14,1781.14 ; U8.17@3165.51,1924.03 cw(c3157.25,1915.76) 3168.94,1915.76 cw(c3180.63,1915.76) U8.17@3172.36,1924.03
52: JP1.47 U4.52 U8.18 | length 2544.8
  Top Layer w10: JP1.47@2311,1667 2364,1720 2439.96,1720 2508.96,1789 2650.88,1789 2680.88,1819 2843.08,1819 2906,1881.92 2906,2044.12 2985.94,2124.07 U4.52@3290,2124.07 ; JP1.47@2311,1687 ccw(c2311,1735.28) 2345.14,1701.14 ccw(c2379.28,1667) JP1.47@2331,1667
  Bottom Layer w10: JP1.47@2311,1667 2364,1720 2486.55,1720 2496.55,1710 3125,1710 3200.43,1785.43 U8.18@3200.43,1950.11 ; JP1.47@2311,1687 ccw(c2311,1735.28) 2345.14,1701.14 ccw(c2379.28,1667) JP1.47@2331,1667 ; U8.18@3197.01,1924.03 cw(c3188.74,1915.76) 3200.43,1915.76 cw(c3212.12,1915.76) U8.18@3203.86,1924.03
55: JP1.48 U4.55 U8.19 | length 2301.3
  Top Layer w10: JP1.48@2411,1667 2516,1772 2657.92,1772 2687.92,1802 2850.12,1802 2923,1874.88 2923,2037.08 2971.42,2085.5 3206.58,2085.5 3227.07,2065.01 U4.55@3290,2065.01 ; JP1.48@2411,1687 ccw(c2411,1735.28) 2445.14,1701.14 ccw(c2479.28,1667) JP1.48@2431,1667
  Bottom Layer w10: JP1.48@2413,1665 JP1.48@2411,1667 2433,1689 3159,1689 3231.93,1761.93 U8.19@3231.93,1950.11 ; U8.19@3228.51,1924.03 cw(c3220.24,1915.76) 3231.93,1915.76 cw(c3243.62,1915.76) U8.19@3235.35,1924.03
71: JP4.11 U4.71 U8.38 | length 1444.9
  Top Layer w10: JP4.11@3076,1265 ccw(c3027.72,1265) 3061.86,1299.14 ccw(c3096,1333.28) JP4.11@3096,1285 ; JP4.11@3096,1265 3050,1311 3050,1475 3203,1628 3493.12,1628 3581.34,1716.21 U4.71@3581.34,1872.1
  Bottom Layer w10: JP4.11@3096,1265 3150,1319 3150,1385 3168.94,1403.94 U8.38@3168.94,1493.42 ; JP4.11@3096,1285 ccw(c3096,1333.28) 3130.14,1299.14 ccw(c3164.28,1265) JP4.11@3116,1265 ; U8.38@3165.51,1467.34 cw(c3157.25,1459.07) 3168.94,1459.07 cw(c3180.63,1459.07) U8.38@3172.36,1467.34
72: JP4.12 U4.72 U8.39 | length 1200.8
  Top Layer w10: JP4.12@3081.86,1379.14 ccw(c3047.72,1413.28) 3096,1413.28 ccw(c3144.28,1413.28) JP4.12@3110.14,1379.14 ; JP4.12@3096,1365 3096,1495.04 3211.96,1611 3500.17,1611 3601.02,1711.86 U4.72@3601.02,1872.1
  Bottom Layer w10: JP4.12@3096,1365 3137.44,1406.48 U8.39@3137.44,1493.42 ; JP4.12@3096,1385 ccw(c3096,1433.18) 3130.07,1399.11 ; JP4.12@3116,1365 cw(c3164.38,1365) 3130.17,1399.21 ; U8.39@3134.02,1467.34 cw(c3125.75,1459.07) 3137.44,1459.07 cw(c3149.13,1459.07) U8.39@3140.87,1467.34
76: JP4.14 U4.76 U8.37 | length 1195
  Top Layer w10: JP4.14@3181.86,1379.14 ccw(c3147.72,1413.28) 3196,1413.28 ccw(c3244.28,1413.28) JP4.14@3210.14,1379.14 ; JP4.14@3196,1365 3196,1521 3252,1577 3519,1577 3679.76,1737.76 U4.76@3679.76,1872.1
  Bottom Layer w10: JP4.14@3181.86,1379.14 ccw(c3137.01,1423.99) 3200.43,1423.99 ; JP4.14@3188.93,1372.07 ccw(c3161.15,1399.85) 3200.43,1399.85 ; JP4.14@3196,1365 3200.43,1369.43 U8.37@3200.43,1493.42 ; U8.37@3197.01,1467.34 cw(c3188.74,1459.07) 3200.43,1459.07 cw(c3212.12,1459.07) U8.37@3203.86,1467.34 ; 3200.43,1402.58 ccw(c3233.58,1402.58) JP4.14@3210.14,1379.14
87: JP4.21 U4.87 U8.21 | length 1785.9
  Top Layer w10: JP4.21@3576,1265 ccw(c3527.72,1265) 3561.86,1299.14 ccw(c3596,1333.28) JP4.21@3596,1285 ; JP4.21@3596,1265 3555,1306 3555,1442 3896.3,1783.3 U4.87@3896.3,1872.1
  Bottom Layer w10: U8.21@3291.5,1924.03 cw(c3283.23,1915.76) 3294.92,1915.76 cw(c3306.61,1915.76) U8.21@3298.35,1924.03 ; U8.21@3294.92,1950.11 3294.92,1899.12 3645,1549.04 3645,1314 JP4.21@3596,1265 ; JP4.21@3596,1285 ccw(c3596,1333.28) 3630.14,1299.14 ccw(c3664.28,1265) JP4.21@3616,1265
88: JP4.22 U4.88 U8.20 | length 1532.6
  Top Layer w10: JP4.22@3581.86,1379.14 ccw(c3547.72,1413.28) 3596,1413.28 ccw(c3644.28,1413.28) JP4.22@3610.14,1379.14 ; JP4.22@3596,1365 3596,1458.96 3915.98,1778.94 U4.88@3915.98,1872.1
  Bottom Layer w10: U8.20@3260,1924.03 cw(c3251.74,1915.76) 3263.43,1915.76 cw(c3275.12,1915.76) U8.20@3266.85,1924.03 ; U8.20@3263.43,1950.11 3263.43,1906.57 3596,1574 JP4.22@3596,1365 ; JP4.22@3581.86,1379.14 ccw(c3547.72,1413.28) 3596,1413.28 ccw(c3644.28,1413.28) JP4.22@3610.14,1379.14
100: JP4.31 U4.100 | length 706.2
  Top Layer w10: JP4.31@4096,1265 4133,1302 4133,1414.92 4152.2,1434.12 U4.100@4152.2,1872.1 ; JP4.31@4096,1285 ccw(c4096,1333.28) 4130.14,1299.14 ccw(c4164.28,1265) JP4.31@4116,1265
103: JP3.13 JP4.33 U4.103 | length 2632.2
  Top Layer w10: 4160,1301 4165.5,1295.5 ; JP4.33@4176.07,1266.66 ccw(c4139.69,1269.68) 4165.5,1295.5 ; JP4.33@4194.34,1284.93 cw(c4191.32,1321.31) 4165.5,1295.5 ; JP4.33@4196,1265 4165.5,1295.5 ; U4.103@4211.26,1872.1 4211.26,1666.26 4169.2,1624.2 4169.2,1427.08 4159,1416.88 4159,1302 4165.5,1295.5
  Bottom Layer w10: JP4.33@4196,1265 4245,1314 4245,1385 4512,1652 5299,1652 5487,1840 5608,1840 JP3.13@5660,1892 ; JP4.33@4196,1285 ccw(c4196,1333.28) 4230.14,1299.14 ccw(c4264.28,1265) JP4.33@4216,1265 ; JP3.13@5640,1892 cw(c5591.72,1892) 5625.86,1857.86 cw(c5660,1823.72) JP3.13@5660,1872
106: JP4.34 U4.106 | length 613.7
  Top Layer w10: JP4.34@4181.86,1379.14 ccw(c4147.72,1413.28) 4196,1413.28 ccw(c4244.28,1413.28) JP4.34@4210.14,1379.14 ; JP4.34@4196,1365 4196,1626 4270.31,1700.31 U4.106@4270.31,1872.1
107: JP3.11 JP4.35 U4.107 | length 2510.3
  Top Layer w10: JP4.35@4276,1265 ccw(c4227.72,1265) 4261.86,1299.14 ccw(c4296,1333.28) JP4.35@4296,1285 ; U4.107@4290,1872.1 4290,1680 4250,1640 4250,1311 JP4.35@4296,1265
  Bottom Layer w10: JP4.35@4296,1265 4296,1266 4345,1315 4345,1376.96 4586.04,1618 5324,1618 5451,1745 5613,1745 JP3.11@5660,1792 ; JP4.35@4296,1285 ccw(c4296,1330.87) 4328.44,1298.44 ; JP4.35@4306,1265 cw(c4332.56,1265) 4313.78,1283.78 ; JP4.35@4316,1265 cw(c4366.7,1265) 4330.85,1300.85 ; JP3.11@5640,1792 cw(c5591.72,1792) 5625.86,1757.86 cw(c5660,1723.72) JP3.11@5660,1772
108: JP3.12 JP4.36 U4.108 | length 2181.4
  Top Layer w10: JP4.36@4281.86,1379.14 ccw(c4247.72,1413.28) 4296,1413.28 ccw(c4344.28,1413.28) JP4.36@4310.14,1379.14 ; JP4.36@4296,1365 4296,1651 4310,1665 4310,1871.78 U4.108@4309.68,1872.1
  Bottom Layer w10: JP4.36@4296,1365 4566,1635 5311.04,1635 5468.04,1792 JP3.12@5560,1792 ; JP4.36@4296,1385 ccw(c4296,1433.28) 4330.14,1399.14 ccw(c4364.28,1365) JP4.36@4316,1365 ; JP3.12@5545.86,1777.86 ccw(c5511.72,1743.72) 5511.72,1792 ccw(c5511.72,1840.28) JP3.12@5545.86,1806.14
109: JP3.9 JP4.37 U4.109 | length 2358.8
  Top Layer w10: U4.109@4329.37,1872.1 4329.37,1650.63 4350,1630 4350,1311 JP4.37@4396,1265 ; JP4.37@4376,1265 ccw(c4327.72,1265) 4361.86,1299.14 ccw(c4396,1333.28) JP4.37@4396,1285
  Bottom Layer w10: JP4.37@4396,1265 4450,1319 4450,1414 4620,1584 5361,1584 5407,1630 5598,1630 JP3.9@5660,1692 ; JP4.37@4396,1285 ccw(c4396,1333.28) 4430.14,1299.14 ccw(c4464.28,1265) JP4.37@4416,1265 ; JP3.9@5640,1692 cw(c5591.72,1692) 5625.86,1657.86 cw(c5660,1623.72) JP3.9@5660,1672
110: JP3.10 JP4.38 U4.110 | length 2168.1
  Top Layer w10: U4.110@4349.05,1872.1 4349.05,1665.95 4396,1619 JP4.38@4396,1365 ; JP4.38@4381.86,1379.14 ccw(c4347.72,1413.28) 4396,1413.28 ccw(c4444.28,1413.28) JP4.38@4410.14,1379.14
  Bottom Layer w10: JP4.38@4386,1365 cw(c4427.04,1365) 4398.02,1394.02 ; JP4.38@4390.17,1384.13 ccw(c4387.78,1392) 4396,1392 ; JP4.38@4401.83,1384.13 cw(c4404.22,1392) 4396,1392 ; JP4.38@4406,1365 cw(c4495.33,1365) 4432.16,1428.16 ; 4415.09,1411.09 ccw(c4461.18,1365) JP4.38@4396,1365 4396,1392 ; JP3.10@5540,1692 cw(c5491.72,1692) 5525.86,1657.86 cw(c5560,1623.72) JP3.10@5560,1672 ; JP3.10@5560,1692 5523,1655 5395,1655 5341,1601 4605,1601 4396,1392
111: JP3.7 JP4.39 U4.111 | length 2254.2
  Top Layer w10: U4.111@4368.74,1872.1 4368.74,1681.26 4450,1600 4450,1311 JP4.39@4496,1265 ; JP4.39@4476,1265 ccw(c4427.72,1265) 4461.86,1299.14 ccw(c4496,1333.28) JP4.39@4496,1285
  Bottom Layer w10: JP4.39@4496,1265 4550,1319 4550,1434.04 4665.96,1550 5618,1550 JP3.7@5660,1592 ; JP4.39@4496,1285 ccw(c4496,1333.28) 4530.14,1299.14 ccw(c4564.28,1265) JP4.39@4516,1265 ; JP3.7@5640,1592 cw(c5591.72,1592) 5625.86,1557.86 cw(c5660,1523.72) JP3.7@5660,1572
112: JP3.8 JP4.40 U4.112 | length 1971.8
  Top Layer w10: U4.112@4388.42,1872.1 4388.42,1687.53 4496,1579.96 JP4.40@4496,1365 ; JP4.40@4481.86,1379.14 ccw(c4447.72,1413.28) 4496,1413.28 ccw(c4544.28,1413.28) JP4.40@4510.14,1379.14
  Bottom Layer w10: JP4.40@4481.86,1379.14 ccw(c4447.72,1413.28) 4496,1413.28 ccw(c4544.28,1413.28) JP4.40@4510.14,1379.14 ; JP4.40@4496,1365 4496,1424 4639,1567 5384.12,1567 5409.12,1592 JP3.8@5560,1592 ; JP3.8@5545.86,1577.86 ccw(c5511.72,1543.72) 5511.72,1592 ccw(c5511.72,1640.28) JP3.8@5545.86,1606.14
113: JP3.5 JP4.41 U4.113 | length 2201.7
  Top Layer w10: U4.113@4408.11,1872.1 4408.11,1691.89 4550,1550 4550,1311 JP4.41@4596,1265 ; JP4.41@4576,1265 ccw(c4527.72,1265) 4561.86,1299.14 ccw(c4596,1333.28) JP4.41@4596,1285
  Bottom Layer w10: JP4.41@4596,1265 4650,1319 4650,1451 4714,1515 5475,1515 5540,1450 5618,1450 JP3.5@5660,1492 ; JP4.41@4596,1285 ccw(c4596,1333.28) 4630.14,1299.14 ccw(c4664.28,1265) JP4.41@4616,1265 ; JP3.5@5640,1492 cw(c5591.72,1492) 5625.86,1457.86 cw(c5660,1423.72) JP3.5@5660,1472
114: JP3.6 JP4.42 U4.114 | length 1898.6
  Top Layer w10: U4.114@4427.79,1872.1 4427.79,1697.21 4596,1529 JP4.42@4596,1365 ; JP4.42@4581.86,1379.14 ccw(c4547.72,1413.28) 4596,1413.28 ccw(c4644.28,1413.28) JP4.42@4610.14,1379.14
  Bottom Layer w10: JP4.42@4581.86,1379.14 ccw(c4547.72,1413.28) 4596,1413.28 ccw(c4644.28,1413.28) JP4.42@4610.14,1379.14 ; JP4.42@4596,1365 4596,1441 4687,1532 5520,1532 JP3.6@5560,1492 ; JP3.6@5540,1492 ccw(c5491.72,1492) 5525.86,1526.14 ccw(c5560,1560.28) JP3.6@5560,1512
117: JP3.3 JP4.43 U4.117 | length 2109.6
  Top Layer w10: U4.117@4486.85,1872.1 4486.85,1750.15 4650,1587 4650,1311 JP4.43@4696,1265 ; JP4.43@4676,1265 ccw(c4627.72,1265) 4661.86,1299.14 ccw(c4696,1333.28) JP4.43@4696,1285
  Bottom Layer w10: JP4.43@4696,1265 4750,1319 4750,1434 4797,1481 5414,1481 5540,1355 5623,1355 JP3.3@5660,1392 ; JP4.43@4696,1285 ccw(c4696,1333.28) 4730.14,1299.14 ccw(c4764.28,1265) JP4.43@4716,1265 ; JP3.3@5640,1392 cw(c5591.72,1392) 5625.86,1357.86 cw(c5660,1323.72) JP3.3@5660,1372
118: JP3.4 JP4.44 U4.118 | length 1813
  Top Layer w10: U4.118@4506.53,1872.1 4506.53,1754.51 4696,1565.04 JP4.44@4696,1365 ; JP4.44@4681.86,1379.14 ccw(c4647.72,1413.28) 4696,1413.28 ccw(c4744.28,1413.28) JP4.44@4710.14,1379.14
  Bottom Layer w10: JP4.44@4681.86,1379.14 ccw(c4647.72,1413.28) 4696,1413.28 ccw(c4744.28,1413.28) JP4.44@4710.14,1379.14 ; JP4.44@4696,1365 4696,1428 4766,1498 5454,1498 JP3.4@5560,1392 ; JP3.4@5540,1392 ccw(c5491.72,1392) 5525.86,1426.14 ccw(c5560,1460.28) JP3.4@5560,1412
119: JP3.1 JP4.45 U4.119 | length 2041
  Top Layer w10: U4.119@4526.22,1872.1 4526.22,1758.87 4750,1535.08 4750,1311 JP4.45@4796,1265 ; JP4.45@4776,1265 ccw(c4727.72,1265) 4761.86,1299.14 ccw(c4796,1333.28) JP4.45@4796,1285
  Bottom Layer w10: JP4.45@4796,1265 4845,1314 4845,1403 4889,1447 5340,1447 5542,1245 5613,1245 JP3.1@5660,1292 ; JP4.45@4796,1285 ccw(c4796,1333.28) 4830.14,1299.14 ccw(c4864.28,1265) JP4.45@4816,1265 ; JP3.1@5640,1292 cw(c5591.72,1292) 5625.86,1257.86 cw(c5660,1223.72) JP3.1@5660,1272
120: JP3.2 JP4.46 U4.120 | length 1741.9
  Top Layer w10: U4.120@4545.9,1872.1 4545.9,1763.22 4796,1513.12 JP4.46@4796,1365 ; JP4.46@4781.86,1379.14 ccw(c4747.72,1413.28) 4796,1413.28 ccw(c4844.28,1413.28) JP4.46@4810.14,1379.14
  Bottom Layer w10: JP4.46@4781.92,1379.2 ccw(c4748.41,1413) 4796,1413 ; JP4.46@4796,1365 4796,1413 ; JP4.46@4810.08,1379.2 cw(c4843.59,1413) 4796,1413 ; JP3.2@5540,1292 ccw(c5491.72,1292) 5525.86,1326.14 ccw(c5560,1360.28) JP3.2@5560,1312 ; JP3.2@5560,1292 5388,1464 4847,1464 4796,1413
126: JP3.14 U4.126 | length 1067.1
  Top Layer w10: U4.126@4640.39,2065.01 5386.99,2065.01 JP3.14@5560,1892 ; JP3.14@5540,1892 ccw(c5491.72,1892) 5525.86,1926.14 ccw(c5560,1960.28) JP3.14@5560,1912
127: JP3.15 U4.127 | length 1176.9
  Top Layer w10: U4.127@4640.39,2084.7 5402.3,2084.7 5547,1940 5608,1940 JP3.15@5660,1992 ; JP3.15@5640,1992 cw(c5591.72,1992) 5625.86,1957.86 cw(c5660,1923.72) JP3.15@5660,1972
128: JP3.16 U4.128 | length 1042.5
  Top Layer w10: U4.128@4640.39,2104.38 4641.01,2105 5447,2105 JP3.16@5560,1992 ; JP3.16@5540,1992 ccw(c5491.72,1992) 5525.86,2026.14 ccw(c5560,2060.28) JP3.16@5560,2012
131: JP3.17 U4.131 | length 1168.1
  Top Layer w10: U4.131@4640.39,2163.44 5425.56,2163.44 5549,2040 5608,2040 JP3.17@5660,2092 ; JP3.17@5640,2092 cw(c5591.72,2092) 5625.86,2057.86 cw(c5660,2023.72) JP3.17@5660,2072
132: JP3.18 U4.132 | length 1033.2
  Top Layer w10: U4.132@4640.39,2183.12 5468.88,2183.12 JP3.18@5560,2092 ; JP3.18@5540,2092 ccw(c5491.72,2092) 5525.86,2126.14 ccw(c5560,2160.28) JP3.18@5560,2112
133: JP3.19 U4.133 | length 1143
  Top Layer w10: U4.133@4640.39,2202.81 5486.19,2202.81 5549,2140 5608,2140 JP3.19@5660,2192 ; JP3.19@5640,2192 cw(c5591.72,2192) 5625.86,2157.86 cw(c5660,2123.72) JP3.19@5660,2172
134: JP3.20 U4.134 | length 986.9
  Top Layer w10: U4.134@4640.39,2222.49 5529.51,2222.49 5532,2220 ; JP3.20@5540.22,2194.99 ccw(c5511.36,2199.35) 5532,2220 ; JP3.20@5557.01,2211.78 cw(c5552.65,2240.64) 5532,2220 ; JP3.20@5560,2192 5532,2220
135: JP3.21 U4.135 | length 1116.1
  Top Layer w10: U4.135@4640.39,2242.18 5610.18,2242.18 JP3.21@5660,2292 ; JP3.21@5640,2292 cw(c5591.72,2292) 5625.86,2257.86 cw(c5660,2223.72) JP3.21@5660,2272
137: JP3.26 U4.137 | length 1082.6
  Top Layer w10: U4.137@4640.39,2281.55 5349.55,2281.55 JP3.26@5560,2492 ; JP3.26@5540,2492 cw(c5491.72,2492) 5525.86,2457.86 cw(c5560,2423.72) JP3.26@5560,2472
139: JP3.27 U4.139 | length 1207.7
  Top Layer w10: U4.139@4640.39,2320.92 5312.96,2320.92 5527.04,2535 5603,2535 JP3.27@5660,2592 ; JP3.27@5640,2592 cw(c5591.72,2592) 5625.86,2557.86 cw(c5660,2523.72) JP3.27@5660,2572
142: JP3.28 U4.142 | length 1083.3
  Top Layer w10: U4.142@4640.39,2379.97 5347.97,2379.97 JP3.28@5560,2592 ; JP3.28@5540,2592 cw(c5491.72,2592) 5525.86,2557.86 cw(c5560,2523.72) JP3.28@5560,2572
143: JP3.29 U4.143 | length 1216.5
  Top Layer w10: U4.143@4640.39,2399.66 5187.86,2399.66 5428.21,2640 5608,2640 JP3.29@5660,2692 ; JP3.29@5640,2692 cw(c5591.72,2692) 5625.86,2657.86 cw(c5660,2623.72) JP3.29@5660,2672
144: JP3.30 U4.144 | length 1108.4
  Top Layer w10: U4.144@4640.39,2419.34 5183.51,2419.34 5456.17,2692 JP3.30@5560,2692 ; JP3.30@5545.86,2677.86 ccw(c5511.72,2643.72) 5511.72,2692 ccw(c5511.72,2740.28) JP3.30@5545.86,2706.14
145: JP3.31 U4.145 | length 1241.7
  Top Layer w10: U4.145@4640.39,2439.03 5179.15,2439.03 5485.12,2745 5613,2745 JP3.31@5660,2792 ; JP3.31@5640,2792 cw(c5591.72,2792) 5625.86,2757.86 cw(c5660,2723.72) JP3.31@5660,2772
146: JP3.32 U4.146 | length 1133.5
  Top Layer w10: U4.146@4640.39,2458.71 5174.79,2458.71 5508.08,2792 JP3.32@5560,2792 ; JP3.32@5545.86,2777.86 ccw(c5511.72,2743.72) 5511.72,2792 ccw(c5511.72,2840.28) JP3.32@5545.86,2806.14
147: JP3.33 U4.147 | length 1266.8
  Top Layer w10: U4.147@4640.39,2478.4 5170.44,2478.4 5532.04,2840 5608,2840 JP3.33@5660,2892 ; JP3.33@5640,2892 cw(c5591.72,2892) 5625.86,2857.86 cw(c5660,2823.72) JP3.33@5660,2872
148: JP3.34 U4.148 | length 1158.6
  Top Layer w10: U4.148@4640.39,2498.08 5166.08,2498.08 JP3.34@5560,2892 ; JP3.34@5540,2892 cw(c5491.72,2892) 5525.86,2857.86 cw(c5560,2823.72) JP3.34@5560,2872
159: JP3.35 U4.159 | length 1210.3
  Top Layer w10: U4.159@4640.39,2714.62 5234.62,2714.62 5460,2940 5608,2940 JP3.35@5660,2992 ; JP3.35@5640,2992 cw(c5591.72,2992) 5625.86,2957.86 cw(c5660,2923.72) JP3.35@5660,2972
160: JP3.36 U4.160 | length 1102.2
  Top Layer w10: U4.160@4640.39,2734.3 4641.09,2735 5210,2735 5467,2992 JP3.36@5560,2992 ; JP3.36@5545.86,2977.86 ccw(c5511.72,2943.72) 5511.72,2992 ccw(c5511.72,3040.28) JP3.36@5545.86,3006.14
161: JP3.37 U4.161 | length 1235.5
  Top Layer w10: U4.161@4640.39,2753.99 5193.99,2753.99 5480,3040 5608,3040 JP3.37@5660,3092 ; JP3.37@5640,3092 cw(c5591.72,3092) 5625.86,3057.86 cw(c5660,3023.72) JP3.37@5660,3072
162: JP3.38 U4.162 | length 1127.3
  Top Layer w10: U4.162@4640.39,2773.67 5173.67,2773.67 5492,3092 JP3.38@5560,3092 ; JP3.38@5545.86,3077.86 ccw(c5511.72,3043.72) 5511.72,3092 ccw(c5511.72,3140.28) JP3.38@5545.86,3106.14
164: JP3.39 U4.164 | length 1277.1
  Top Layer w10: U4.164@4640.39,2813.04 4702.04,2813.04 4718,2829 5184,2829 5490,3135 5600,3135 5657,3192 JP3.39@5660,3192 ; 5620.74,3155.74 cw(c5660,3116.47) JP3.39@5660,3172 ; 5627.98,3162.98 ccw(c5598.96,3192) JP3.39@5640,3192 ; 5637.81,3172.81 cw(c5660,3150.62) JP3.39@5660,3182
166: JP3.40 U4.166 | length 1136.1
  Top Layer w10: U4.166@4640.39,2852.41 5142.41,2852.41 5482,3192 JP3.40@5560,3192 ; JP3.40@5545.86,3177.86 ccw(c5511.72,3143.72) 5511.72,3192 ccw(c5511.72,3240.28) JP3.40@5545.86,3206.14
167: JP3.41 U4.167 | length 1269.4
  Top Layer w10: U4.167@4640.39,2872.1 5107.1,2872.1 5475,3240 5608,3240 JP3.41@5660,3292 ; JP3.41@5640,3292 cw(c5591.72,3292) 5625.86,3257.86 cw(c5660,3223.72) JP3.41@5660,3272
168: JP3.42 U4.168 | length 1161.2
  Top Layer w10: U4.168@4640.39,2891.78 5086.78,2891.78 5487,3292 JP3.42@5560,3292 ; JP3.42@5545.86,3277.86 ccw(c5511.72,3243.72) 5511.72,3292 ccw(c5511.72,3340.28) JP3.42@5545.86,3306.14